# EAGLE board headstage-no-omnetics (EAGLE 6.5.0)
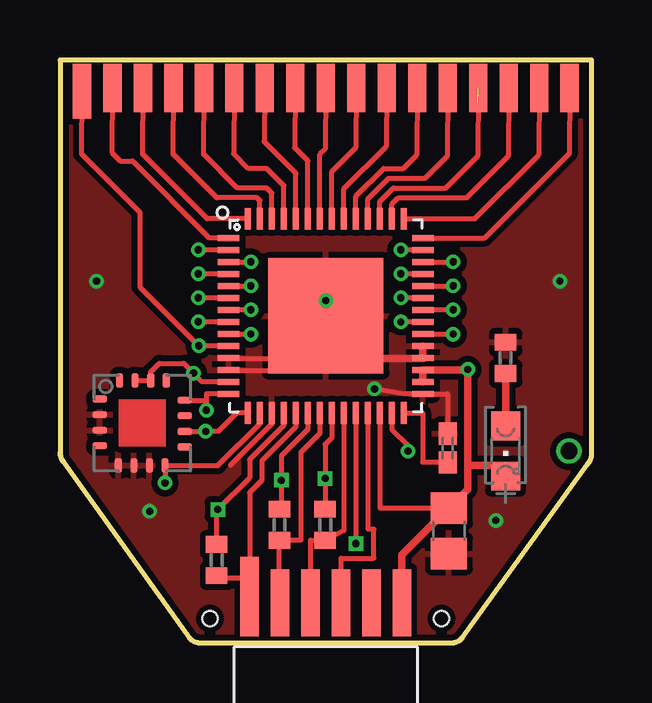
[diagram p0: board, top side]
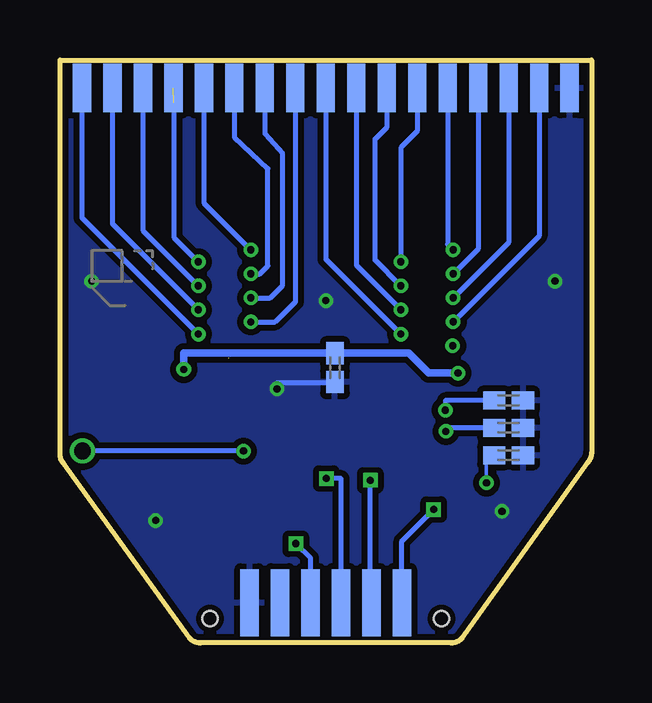
[diagram p1: board, bottom side, seen from below]

Size 22.15 x 24.31 mm. Coordinates in mm from the lower left corner, seen from the top.
Outline: 0,24.31 0,7.94 arc45 0.18,7.5 5.4,0.19 arc45 5.85,0 16.3,0 arc45 16.75,0.19 21.96,7.43 arc45 22.15,7.88 22.15,24.31 0,24.31
Copper layers (1*16): Top 0.035mm / dielectric 1.5mm / Bottom 0.035mm
Design rules "Fusion_eagle_rule_v1.1 *": minimum track width 6mil, minimum drill 0.3mm, track to track 6mil, track to pad 6mil, pad to pad 6mil, via to via 6mil, smd to smd 0mil, copper to edge 10mil, drill to drill 10mil, minimum pad ring 10mil, minimum via ring 6mil, stop-mask expansion 2mil, vias tented up to drill 100mil, thermal gap 10mil
Holes 0.64 mm at 6.25,1.02 15.9,1.02

## Footprints (pad centres in the part's own frame; a part is rotated, then mirrored left to right if it is on the bottom)
C0402K = smd 0.925 x 0.74: 1 -0.6,0; 2 0.6,0
C0805 = smd 1.3 x 1.5: 1 -0.95,0; 2 0.95,0
CHIPLED_0805 = smd 1.2 x 1.2: A 0,-1.05; C 0,1.05
R0402 = smd 0.7 x 0.9: 1 -0.65,0; 2 0.65,0
MILLMAX-12PIN = smd 0.762 x 2.794 bottom: B1 3.175,-3.429; B2 1.905,-3.429; B3 0.635,-3.429; B4 -0.635,-3.429; B5 -1.905,-3.429; B6 -3.175,-3.429 | smd 0.762 x 3.302: T1 3.175,-3.683 | smd 0.762 x 2.794: T2 1.905,-3.429; T3 0.635,-3.429; T4 -0.635,-3.429; T5 -1.905,-3.429; T6 -3.175,-3.429
QFN56_8_X_8_LARGE = smd 0.9 x 0.25: 1 -4.05,3.25; 2 -4.05,2.75; 3 -4.05,2.25; 4 -4.05,1.75; 5 -4.05,1.25; 6 -4.05,0.75; 7 -4.05,0.25; 8 -4.05,-0.25; 9 -4.05,-0.75; 10 -4.05,-1.25; 11 -4.05,-1.75; 12 -4.05,-2.25; 13 -4.05,-2.75; 14 -4.05,-3.25; 29 4.05,-3.25; 30 4.05,-2.75; 31 4.05,-2.25; 32 4.05,-1.75; 33 4.05,-1.25; 34 4.05,-0.75; 35 4.05,-0.25; 36 4.05,0.25; 37 4.05,0.75; 38 4.05,1.25; 39 4.05,1.75; 40 4.05,2.25; 41 4.05,2.75; 42 4.05,3.25 | smd 0.25 x 0.9: 15 -3.25,-4.05; 16 -2.75,-4.05; 17 -2.25,-4.05; 18 -1.75,-4.05; 19 -1.25,-4.05; 20 -0.75,-4.05; 21 -0.25,-4.05; 22 0.25,-4.05; 23 0.75,-4.05; 24 1.25,-4.05; 25 1.75,-4.05; 26 2.25,-4.05; 27 2.75,-4.05; 28 3.25,-4.05; 43 3.25,4.05; 44 2.75,4.05; 45 2.25,4.05; 46 1.75,4.05; 47 1.25,4.05; 48 0.75,4.05; 49 0.25,4.05; 50 -0.25,4.05; 51 -0.75,4.05; 52 -1.25,4.05; 53 -1.75,4.05; 54 -2.25,4.05; 55 -2.75,4.05; 56 -3.25,4.05 | smd 4.8 x 4.8: CENTER 0,0
ADXL335 = smd 0.61 x 0.305: COM1 -1.775,-0.3; NC1 -1.775,1; NC2 -1.775,-0.95; NC3 1.775,-1; NC4 1.775,0.3; ST -1.775,0.35; XOUT 1.775,0.95; YOUT 1.775,-0.35 | smd 0.305 x 0.61: COM2 -1,-1.775; COM3 -0.35,-1.775; COM4 0.3,-1.775; NC5 1,1.775; NC6 -0.95,1.775; VS1 0.35,1.775; VS2 -0.3,1.775; ZOUT 0.95,-1.775
FTSH-117-END = smd 0.762 x 2.286: P$1 -10.16,-0.127 | smd 0.762 x 2.032: P$2 -8.89,0; P$3 -7.62,0; P$4 -6.35,0; P$5 -5.08,0; P$6 -3.81,0; P$7 -2.54,0; P$8 -1.27,0; P$9 0,0; P$10 1.27,0; P$11 2.54,0; P$12 3.81,0; P$13 5.08,0; P$14 6.35,0; P$15 7.62,0; P$16 8.89,0; P$17 10.16,0 | smd 0.762 x 2.032 bottom: P$18 10.16,0; P$19 8.89,0; P$20 7.62,0; P$21 6.35,0; P$22 5.08,0; P$23 3.81,0; P$24 2.54,0; P$25 1.27,0; P$26 0,0; P$27 -1.27,0; P$28 -2.54,0; P$29 -3.81,0; P$30 -5.08,0; P$31 -6.35,0; P$32 -7.62,0; P$33 -8.89,0; P$34 -10.16,0

## Placement (x,y rotation side)
C_A  0.1uF  [C0402K]  10.69,11.48 270 bottom
C_REF  10nF  [C0402K]  16.15,8.13 90 top
C_VDD  10uF  [C0805]  16.21,4.67 90 top
C_X  0.1uF  [C0402K]  3.45,10.11 180 bottom
C_Y  0.1uF  [C0402K]  3.45,8.97 180 bottom
C_Z  0.1uF  [C0402K]  3.45,7.82 180 bottom
LED1  [CHIPLED_0805]  18.57,8 180 top
R1  100  [R0402]  6.53,3.45 270 top
R2  100  [R0402]  9.14,4.93 270 top
R3  100  [R0402]  11.05,4.93 270 top
RLED  300  [R0402]  18.57,11.89 270 top
S2  RHD2000-CABLE-AMP-SIDEMILLMAX  [MILLMAX-12PIN]  11.07,-1.75 180 top
U1  RHD2132_QFN  [QFN56_8_X_8_LARGE]  11.07,13.64 0 top
U$1  ADXL335  [ADXL335]  3.43,9.17 0 top
U$2  FTSH-117BOARD-END  [FTSH-117-END]  11.07,23.14 0 top

## Library data of the parts
C_A C_REF C_X C_Y C_Z R1-R3 RLED = resistor
C_VDD = rcl
LED1 = led
S2 U1 = RHD2000
U$1 = voigts
U$2 = Samtec50Mil

## Nets
ADC_REF: C_REF.1 U1.28
AUXOUT: U1.27
CS+: R1.2 S2.T1 U1.19
CS-: R1.1 S2.B1 U1.18
GND: C_A.2 C_REF.2 C_VDD.1 C_X.1 C_Y.1 C_Z.1 RLED.1 S2.B6 U1.11 U1.12 U1.17 U1.29 U1.32 U1.33 U1.CENTER U$1.COM1 U$1.COM2 U$1.COM3 U$1.COM4 U$1.ST U$2.P$34
IN0: U1.9 U$2.P$26
IN1: U1.8 U$2.P$33
IN2: U1.7 U$2.P$27
IN3: U1.6 U$2.P$32
IN4: U1.5 U$2.P$28
IN5: U1.4 U$2.P$31
IN6: U1.3 U$2.P$29
IN7: U1.2 U$2.P$30
IN8: U1.1 U$2.P$2
IN9: U1.56 U$2.P$3
IN10: U1.55 U$2.P$4
IN11: U1.54 U$2.P$5
IN12: U1.53 U$2.P$6
IN13: U1.52 U$2.P$7
IN14: U1.51 U$2.P$8
IN15: U1.50 U$2.P$9
IN16: U1.49 U$2.P$10
IN17: U1.48 U$2.P$11
IN18: U1.47 U$2.P$12
IN19: U1.46 U$2.P$13
IN20: U1.45 U$2.P$14
IN21: U1.44 U$2.P$15
IN22: U1.43 U$2.P$16
IN23: U1.42 U$2.P$17
IN24: U1.41 U$2.P$22
IN25: U1.40 U$2.P$21
IN26: U1.39 U$2.P$23
IN27: U1.38 U$2.P$20
IN28: U1.37 U$2.P$24
IN29: U1.36 U$2.P$19
IN30: U1.35 U$2.P$25
IN31: U1.34 U$2.P$18
LEDOUT: LED1.A RLED.2
MISO1+: S2.T4 U1.25
MISO1-: S2.B4 U1.24
MOSI+: R3.2 S2.T3 U1.23
MOSI-: R3.1 S2.B3 U1.22
REF: U1.10 U$2.P$1
SCLK+: R2.2 S2.T2 U1.21
SCLK-: R2.1 S2.B2 U1.20
VDD: C_A.1 C_VDD.2 LED1.C S2.T6 U1.13 U1.26 U1.30 U1.31 U$1.VS1 U$1.VS2
XOUT: C_X.2 U1.14 U$1.XOUT
YOUT: C_Y.2 U1.15 U$1.YOUT
ZOUT: C_Z.2 U1.16 U$1.ZOUT

## Tracks (layer width: path | path; a pad name or v marks a point on that pad's centre or on a via)
ADC_REF
  Top 0.203: U1.28 15.11,9.59 15.11,7.53 C_REF.1
AUXOUT  (via drill 0.3, 0.7)
  Top 0.203: U1.27 13.82,8.88 14.5,8.2 v14.5,8
  Bottom 0.203: v14.5,8 v21.21,8
CS+
  Top 0.203: U1.19 9.82,9.01 8.41,7.59 8.41,6.78 7.9,6.27 7.9,2.72 | 7.9,2.72 S2.T1 | R1.2 6.61,2.72 7.9,2.72
CS-  (via drill 0.3)
  Top 0.203: U1.18 9.32,9.07 7.9,7.65 7.9,6.88 v6.58,5.56 6.53,5.51 R1.1
  Bottom 0.203: S2.B1 7.9,4.24 v6.58,5.56
GND  (via drill 0.3)  (1 unrouted)
  Top 0.203: 7.01,11.86 9.3,11.86 | 7.01,11.35 9.04,11.35 9.55,11.86 9.3,11.86 | 9.3,11.86 11.07,13.13 | 13.11,11.86 12.98,11.73 | U1.17 8.82,9.13 7.11,7.42 | C_REF.2 16.15,10.39 U1.29 14.32,10.39 v13.11,10.59
  Top 0.305: 15.14,11.86 13.11,11.86 | U1.32 U1.33
  Bottom 0.203: v13.11,10.59 13.11,10.85 10.69,10.85 10.69,10.97
  other vias: 18.16,5.11 11.07,14.27 3.73,5.49 1.52,15.09 20.83,15.09
  pour Top (isolate 0.254): 0.13,7.81 5.71,-0.15 16.33,-0.2 22.02,7.75 22.02,24.36 0.13,24.36
  pour Bottom (isolate 0.254): 0.2,24.24 0.08,10.64 0.08,7.65 5.82,-0.13 16.38,-0.13 22.02,7.54 22.02,12.27 21.92,24.26
IN0  (via drill 0.3)
  Top 0.203: v7.95,12.88 6.88,12.88 6.9,12.89 U1.9
  Bottom 0.203: U$2.P$26 11.07,16 v7.95,12.88
IN1  (via drill 0.3)
  Top 0.203: U1.8 v5.77,13.39
  Bottom 0.203: U$2.P$33 2.18,16.97 v5.77,13.39
IN2  (via drill 0.3)
  Top 0.203: 6.76,13.89 U1.7 | U1.7 v7.95,13.89 | U1.7
  Bottom 0.203: U$2.P$27 9.8,15.75 v7.95,13.89
IN3  (via drill 0.3)
  Top 0.203: U1.6 v5.77,14.39
  Bottom 0.203: U$2.P$32 3.45,16.7 v5.77,14.39
IN4  (via drill 0.3)
  Top 0.203: U1.5 v7.95,14.89
  Bottom 0.203: v7.95,14.89 9.02,15.96 9.02,21.01 8.53,21.49 U$2.P$28
IN5  (via drill 0.3)
  Top 0.203: U1.4 v5.77,15.39
  Bottom 0.203: U$2.P$31 4.72,16.43 v5.77,15.39
IN6  (via drill 0.3)
  Top 0.203: U1.3 v7.95,15.89
  Bottom 0.203: v7.95,15.89 7.95,20.65 7.26,21.34 U$2.P$29
IN7  (via drill 0.3)
  Top 0.203: U1.2 v5.77,16.39
  Bottom 0.203: U$2.P$30 5.99,16.62 v5.77,16.39
IN8
  Top 0.203: U1.1 6.22,16.89 3.02,20.09 2.51,20.09 2.16,20.45 U$2.P$2
IN9
  Top 0.203: U$2.P$3 3.43,20.4 6.14,17.69 U1.56
IN10
  Top 0.203: U1.55 8.32,18.45 8.2,18.57 6.53,18.57 4.7,20.4 U$2.P$4
IN11
  Top 0.203: U$2.P$5 5.97,20.4 7.39,18.97 8.61,18.97 8.82,18.76 U1.54
IN12
  Top 0.203: U1.53 9.32,19.07 8.61,19.79 7.85,19.79 7.24,20.4 U$2.P$6
IN13
  Top 0.203: U1.52 9.82,19.59 8.51,20.9 U$2.P$7
IN14
  Top 0.203: U1.51 10.32,20.1 9.78,20.65 U$2.P$8
IN15
  Top 0.203: U1.50 10.82,20.37 11.05,20.6 U$2.P$9
IN16
  Top 0.203: U1.49 11.32,19.66 12.32,20.65 U$2.P$10
IN17
  Top 0.203: U1.48 11.82,18.94 13.59,20.7 U$2.P$11
IN18
  Top 0.203: U1.47 12.32,18.62 13.49,19.79 14.3,19.79 14.86,20.35 U$2.P$12
IN19
  Top 0.203: U$2.P$13 16.13,20.29 15.21,19.38 13.69,19.38 12.82,18.51 U1.46
IN20
  Top 0.203: U1.45 13.32,18.4 13.89,18.97 16.08,18.97 17.4,20.29 U$2.P$14
IN21
  Top 0.203: U1.44 13.82,18.29 14.1,18.57 16.94,18.57 18.67,20.29 U$2.P$15
IN22
  Top 0.203: U$2.P$16 19.94,20.35 17.28,17.69 U1.43
IN23
  Top 0.203: U$2.P$17 21.21,20.4 17.7,16.89 U1.42
IN24  (via drill 0.3)
  Top 0.203: U1.41 v14.2,16.39
  Bottom 0.203: U$2.P$22 16.15,18.35 v14.2,16.39
IN25  (via drill 0.3)  (1 unrouted)
  Top 0.203: U1.40 v16.38,15.89
  Bottom 0.203: 17.4,22.53 17.4,16.91 v16.38,15.89
IN26  (via drill 0.3)
  Top 0.203: U1.39 v14.2,15.39
  Bottom 0.203: v14.2,15.39 13.82,15.39 13.49,15.72 13.49,19.79 14.88,21.08 U$2.P$23
IN27  (via drill 0.3)
  Top 0.203: U1.38 v16.38,14.89
  Bottom 0.203: U$2.P$20 18.69,17.2 v16.38,14.89
IN28  (via drill 0.3)
  Top 0.203: U1.37 v14.2,14.39
  Bottom 0.203: v14.2,14.39 13.4,14.39 12.88,14.91 12.88,20.4 13.61,21.23 U$2.P$24
IN29  (via drill 0.3)
  Top 0.203: v16.38,13.89 U1.36
  Bottom 0.203: U$2.P$19 19.96,17.48 v16.38,13.89
IN30  (via drill 0.3)
  Top 0.203: 15.39,13.39 U1.35 | U1.35 v14.2,13.39 | U1.35
  Bottom 0.203: v14.2,13.39 13.18,13.39 12.34,14.22 U$2.P$25
IN31  (via drill 0.3)
  Top 0.203: v16.38,12.88 15.14,12.88 U1.34
  Bottom 0.203: U$2.P$18 21.23,17.73 v16.38,12.88
LEDOUT
  Top 0.305: LED1.A RLED.2
MISO1+
  Top 0.203: S2.T4 11.71,3.53 13.08,3.53 13.08,4.75 12.82,4.75 U1.25
MISO1-  (via drill 0.3)
  Top 0.203: U1.24 v12.32,4.14
  Bottom 0.203: S2.B4 11.71,3.53 v12.32,4.14
MOSI+
  Top 0.203: S2.T3 10.44,4.28 R3.2 11.82,4.68 U1.23
MOSI-  (via drill 0.3)
  Top 0.203: U1.22 11.32,8.56 11.05,8.28 v11.05,6.86 R3.1
  Bottom 0.203: S2.B3 10.44,6.86 v11.05,6.86
REF  (via drill 0.3)
  Top 0.203: U$2.P$1 0.89,20.4 3.33,17.96 3.33,14.85 v5.79,12.39 U1.10
SCLK+
  Top 0.203: U1.21 10.82,8.74 10.03,7.95 10.03,4.28 R2.2 9.14,1.68 S2.T2
SCLK-  (via drill 0.3)
  Top 0.203: U1.20 10.32,8.9 9.22,7.8 v9.22,6.78 9.22,5.98 R2.1
  Bottom 0.203: S2.B2 9.22,1.68 v9.22,6.78
VDD  (via drill 0.3)
  Top 0.203: U1.13 5.93,10.89 v5.56,11.25 5.16,11.66 4.14,11.66 3.78,11.3 U$1.VS1 U$1.VS2 | 16.99,11.39 v16.99,11.4 | U1.26 13.32,5.62 C_VDD.2
  Top 0.305: 16.99,7.39 v16.99,11.4 | U1.30 U1.31 16.99,11.39 | LED1.C 18.4,7.39 16.99,7.39 | 16.99,7.39 16.99,6.41 C_VDD.2 14.25,3.67 S2.T6
  Bottom 0.305: v5.56,11.25 6.78,11.25 7.61,12.08 C_A.1 16.99,12.08 v16.99,11.4
XOUT  (via drill 0.3)
  Top 0.203: U$1.XOUT 6.1,10.12 v6.1,9.7 6.1,10.39 U1.14
  Bottom 0.203: C_X.2 6.1,10.11 v6.1,9.7
YOUT  (via drill 0.3)
  Top 0.203: U1.15 7.35,9.59 6.58,8.82 v6.07,8.82 U$1.YOUT
  Bottom 0.203: C_Y.2 6.07,8.97 v6.07,8.82
ZOUT  (via drill 0.3)
  Top 0.203: U1.16 8.32,9.14 6.58,7.39 U$1.ZOUT v4.38,6.67
  Bottom 0.152: v4.38,6.67 4.38,7.85 C_Z.2

## Text on the board
tDocu: ref | aux in | led
bDocu: Sept 2013 | rev 2.1 samtec | 32ch headstage | open-ephys.org | powered by | oe | intan | C_z,y,x | r100